# Altium PCB 48V-5V Buck.PcbDoc
Units mm, origin at the board's own origin, x right, y up, seen from the top; angles counter-clockwise.
Board outline 45.52 x 39.22 mm, 4 copper layers (L1-TOP, L2-GND, L3-GND, L4-BOT), stack 1.65 mm thick; 39 components, 14 nets, 99 pads, 43 vias.
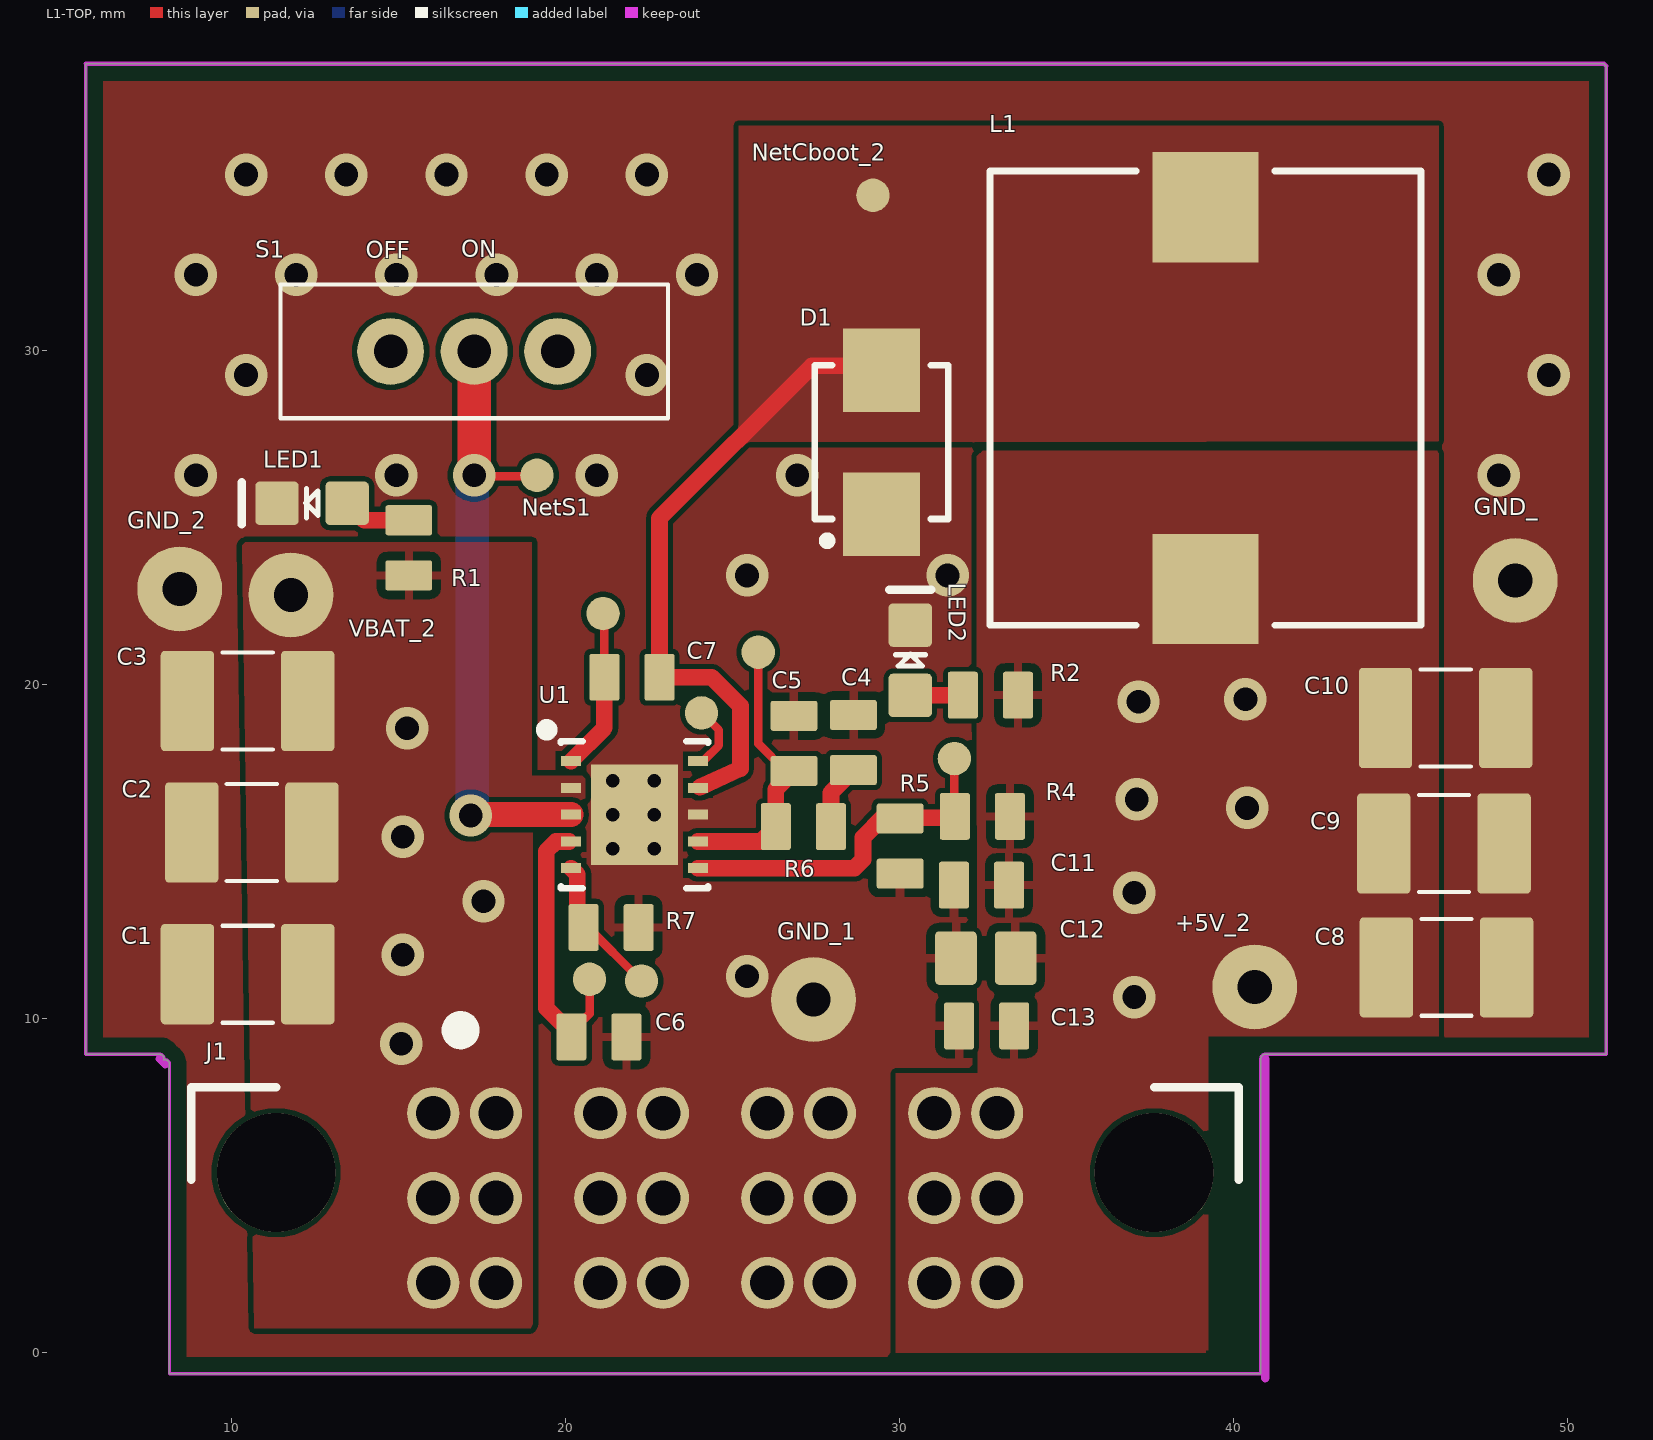
[diagram p0: L1-TOP view]
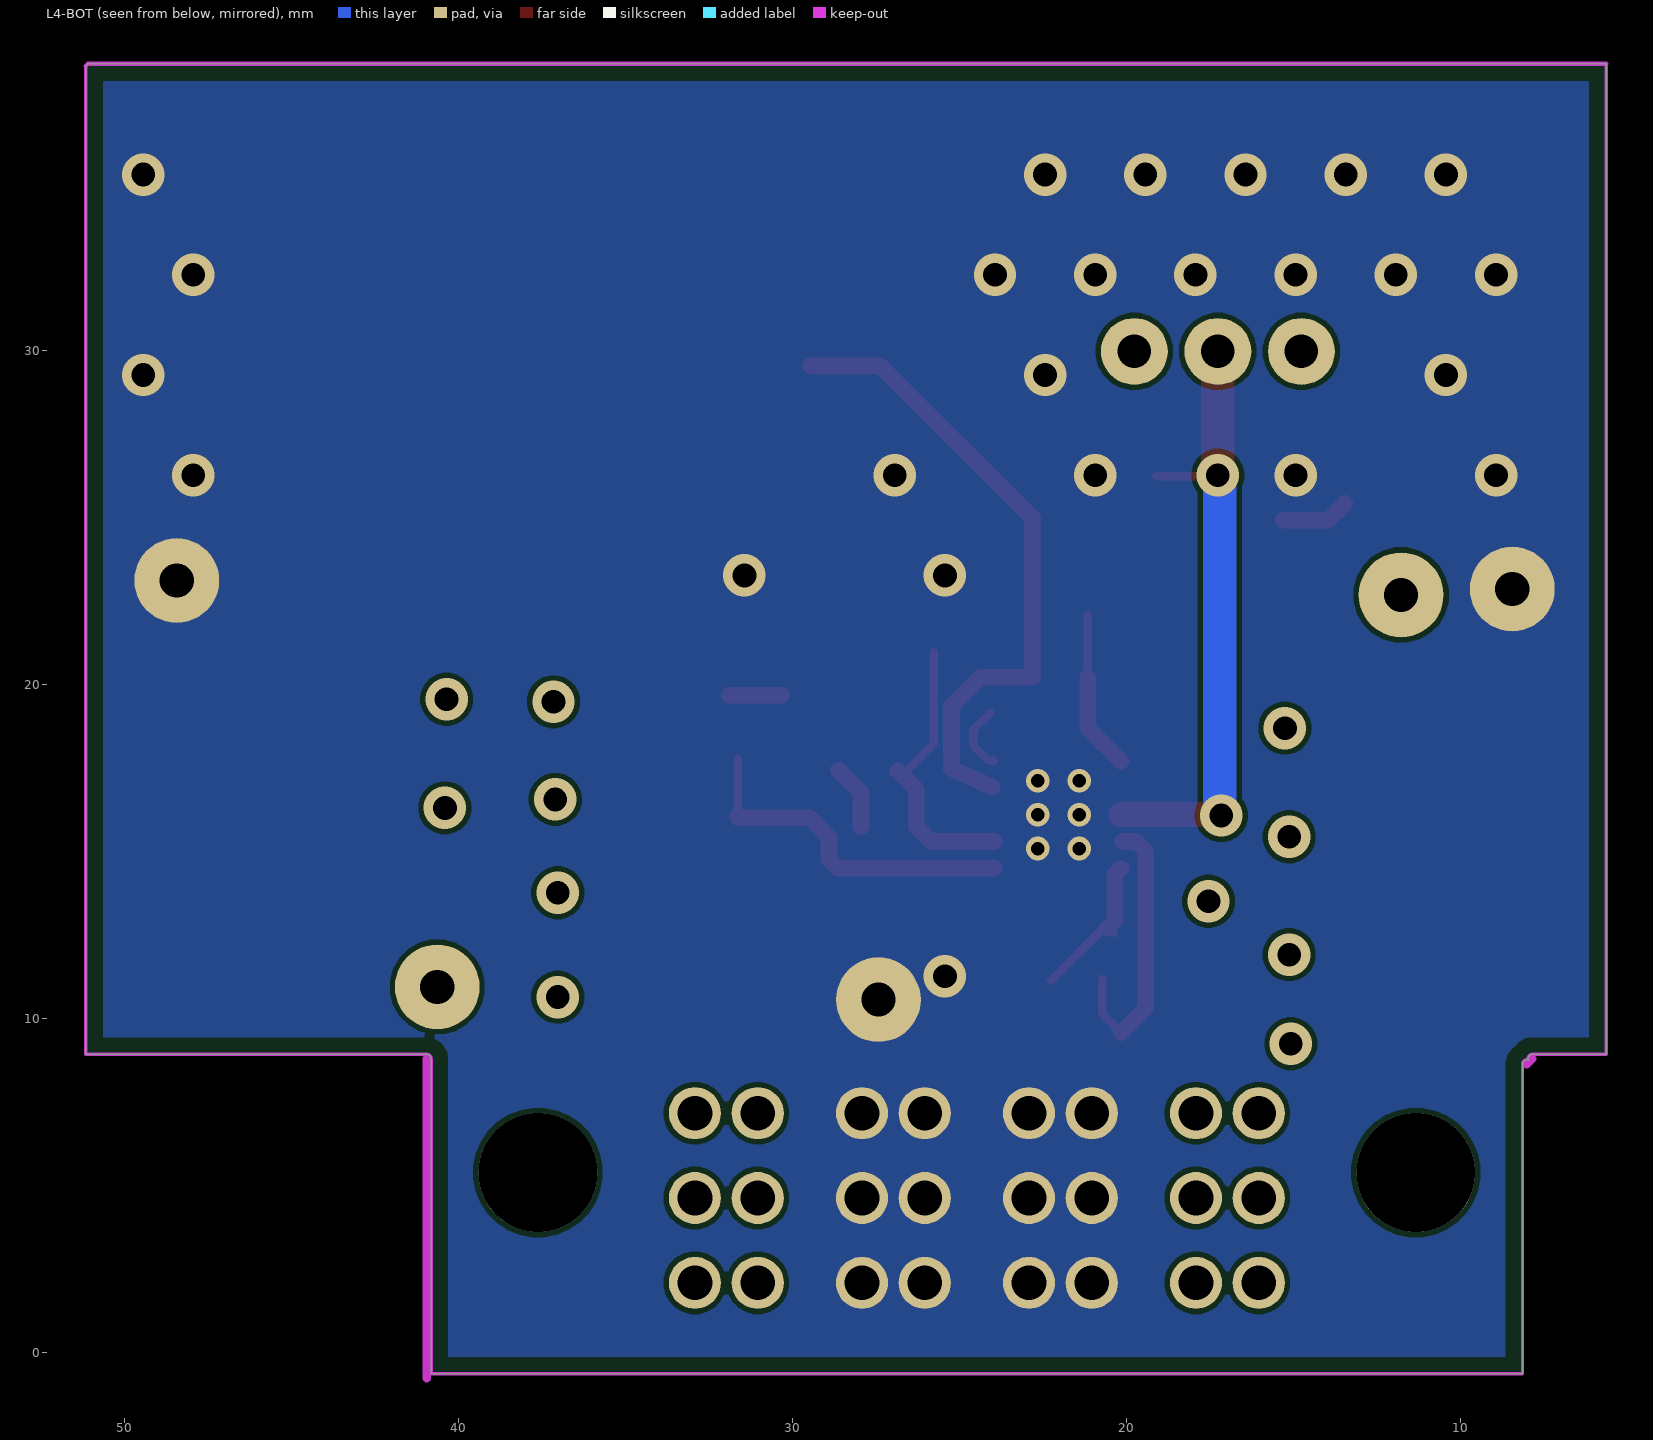
[diagram p1: L4-BOT view, seen from below]
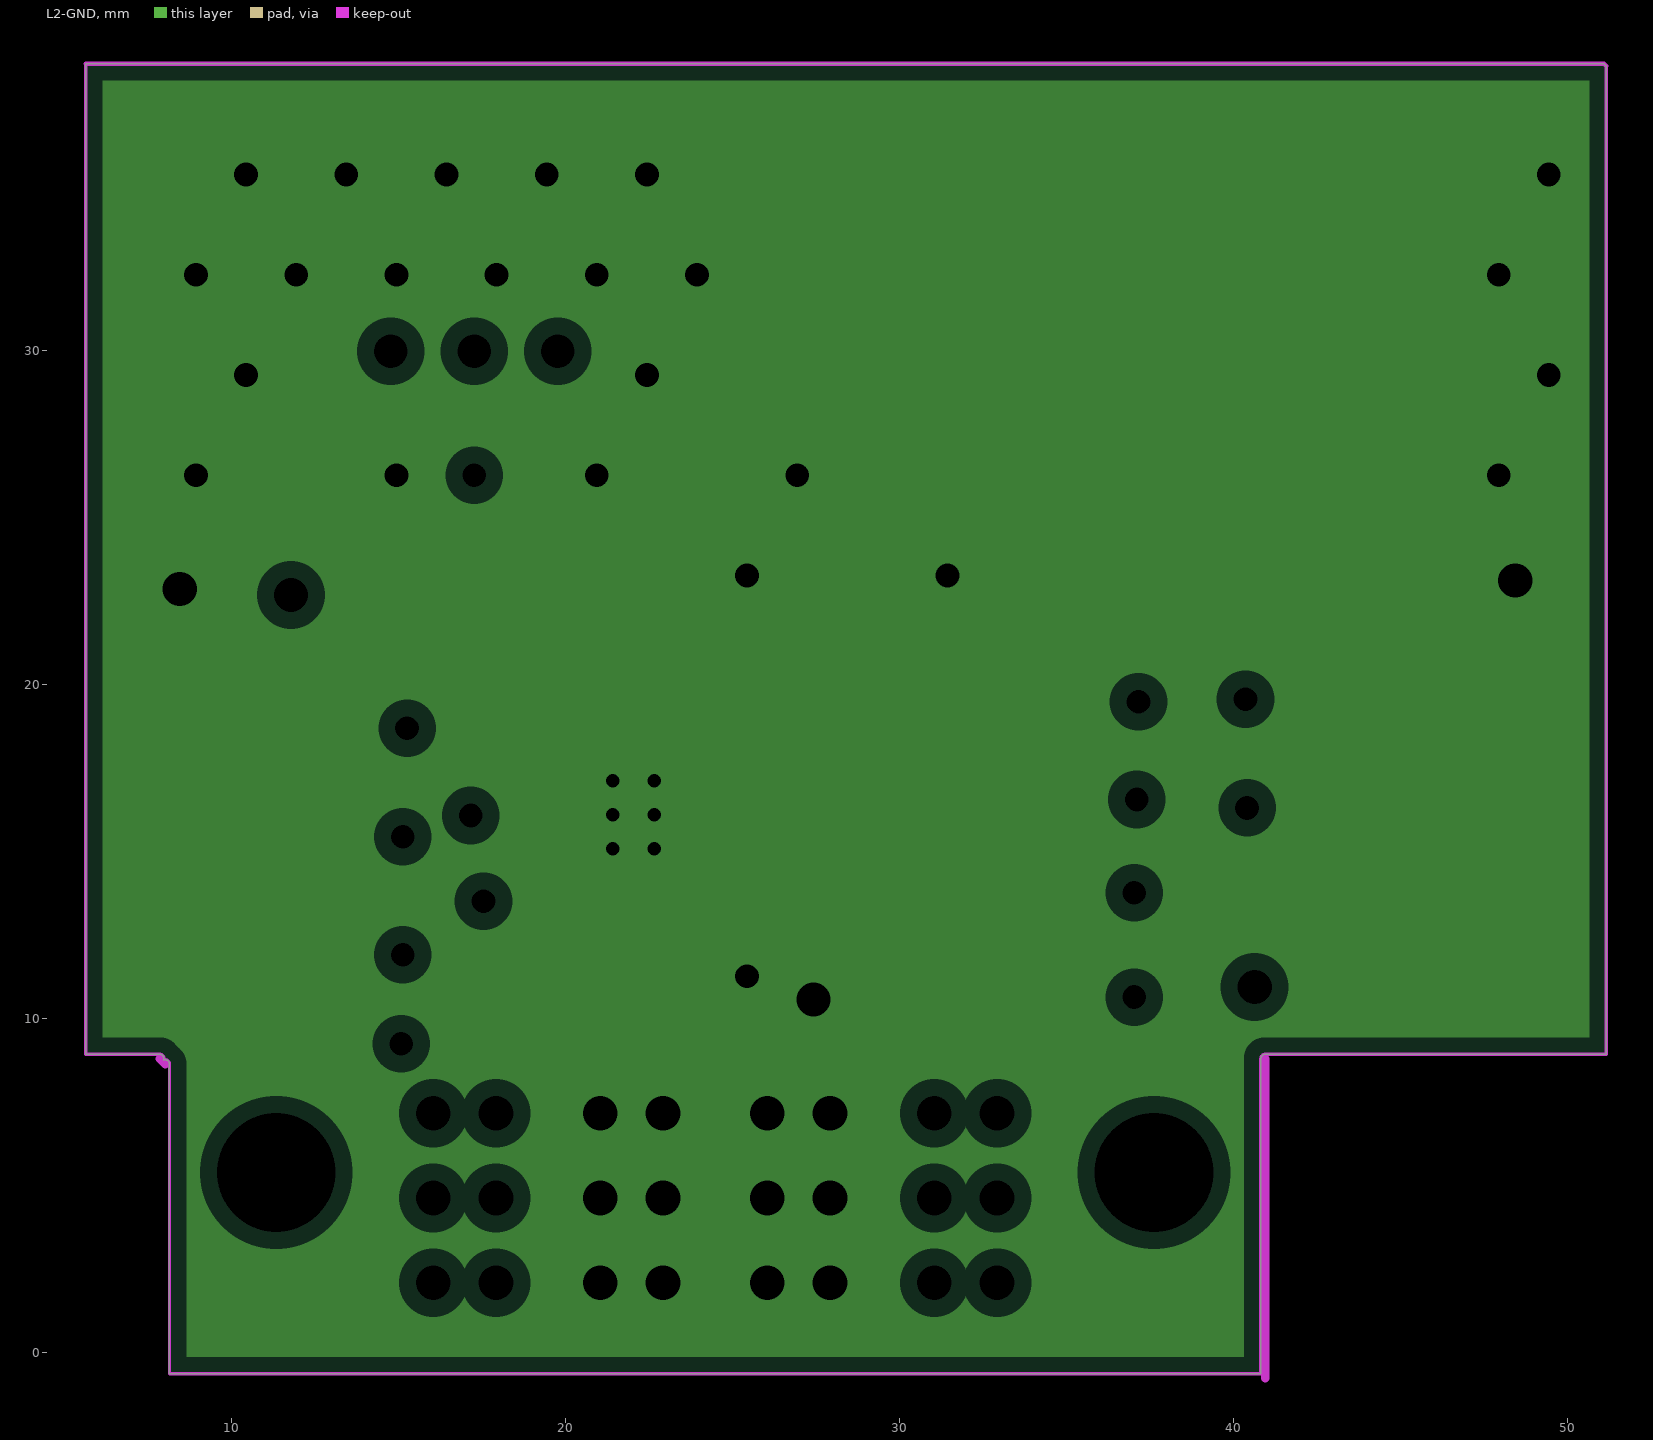
[diagram p2: L2-GND, clearances drawn from the general rule]
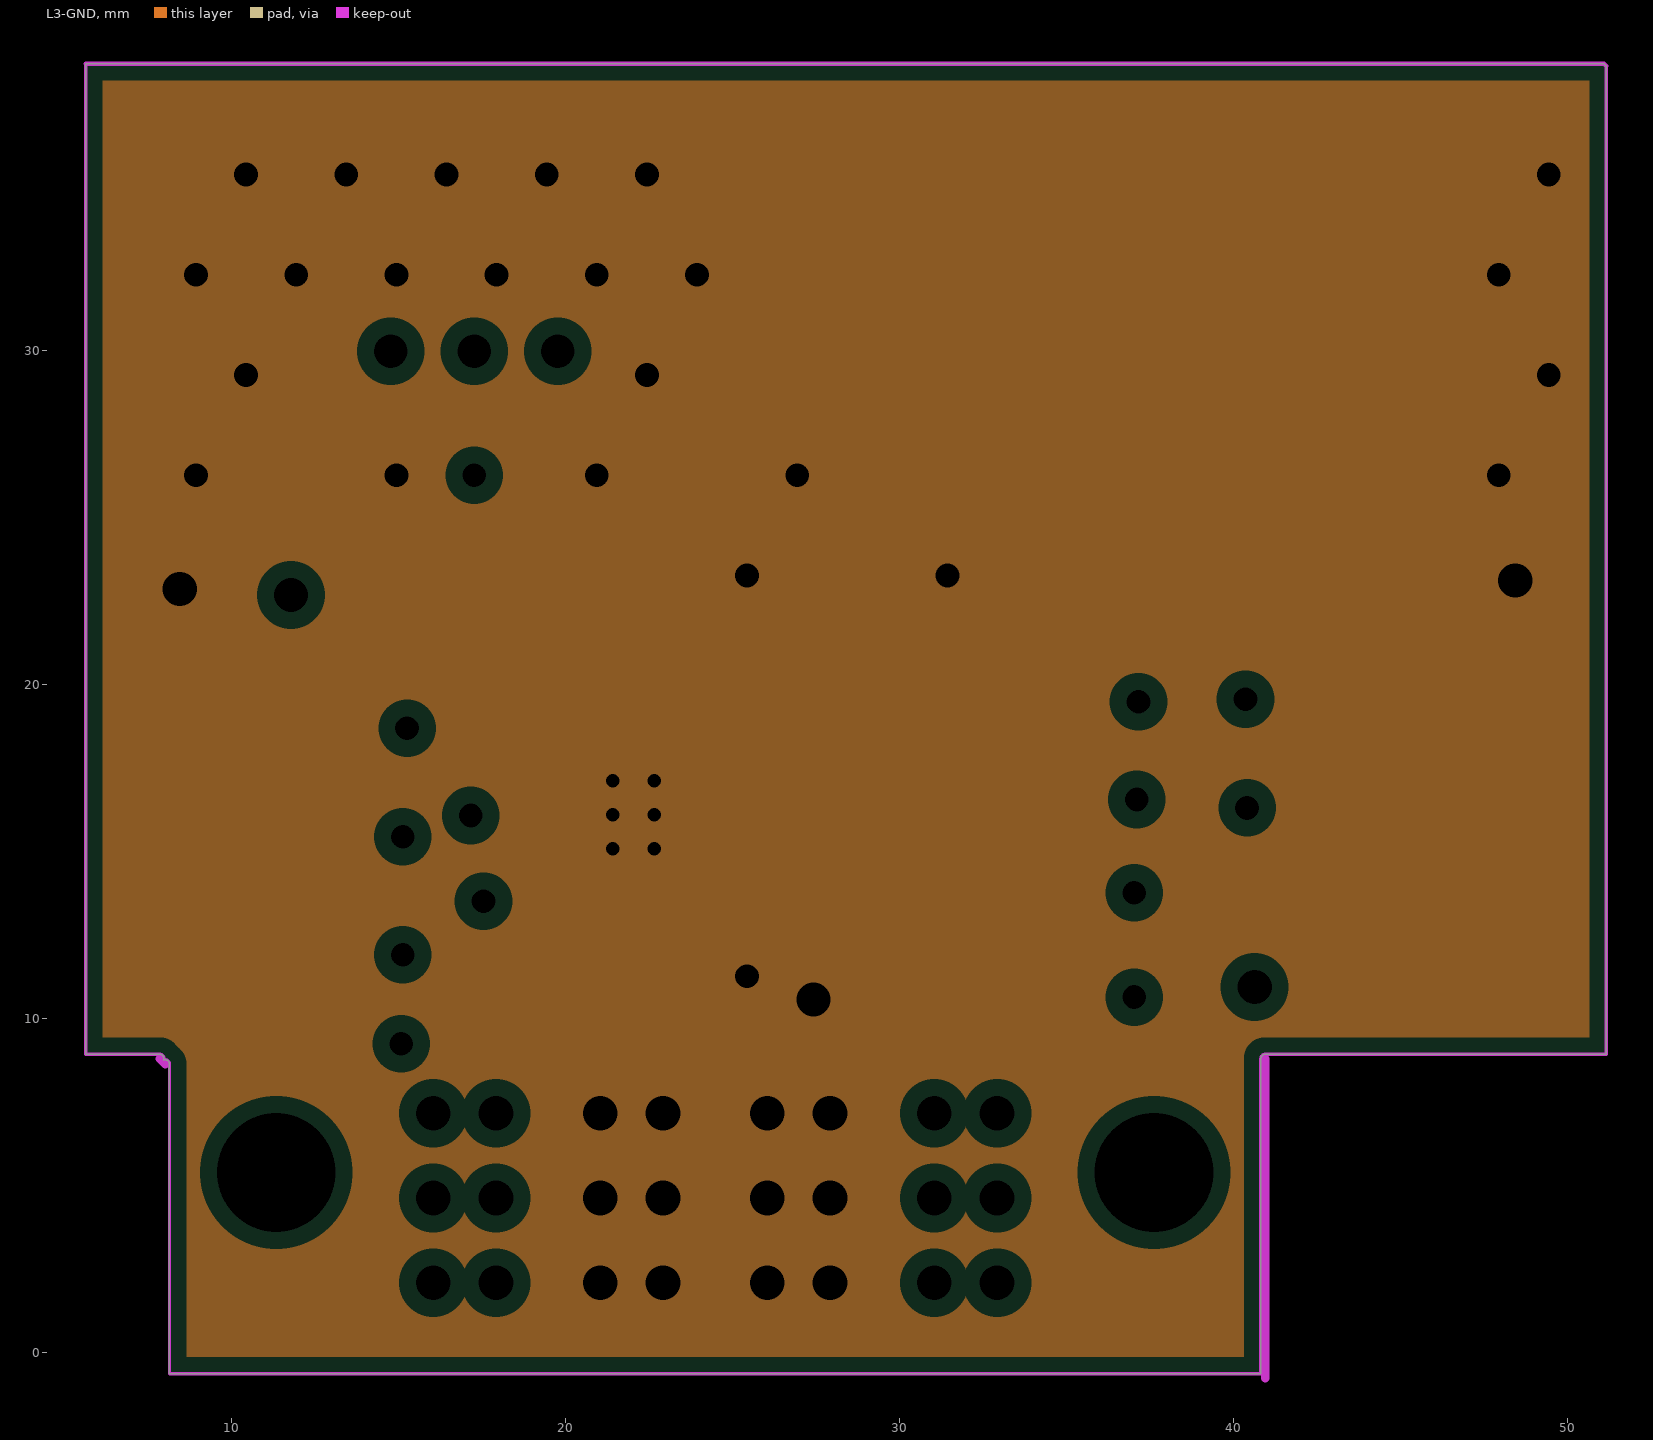
[diagram p3: L3-GND, clearances drawn from the general rule]
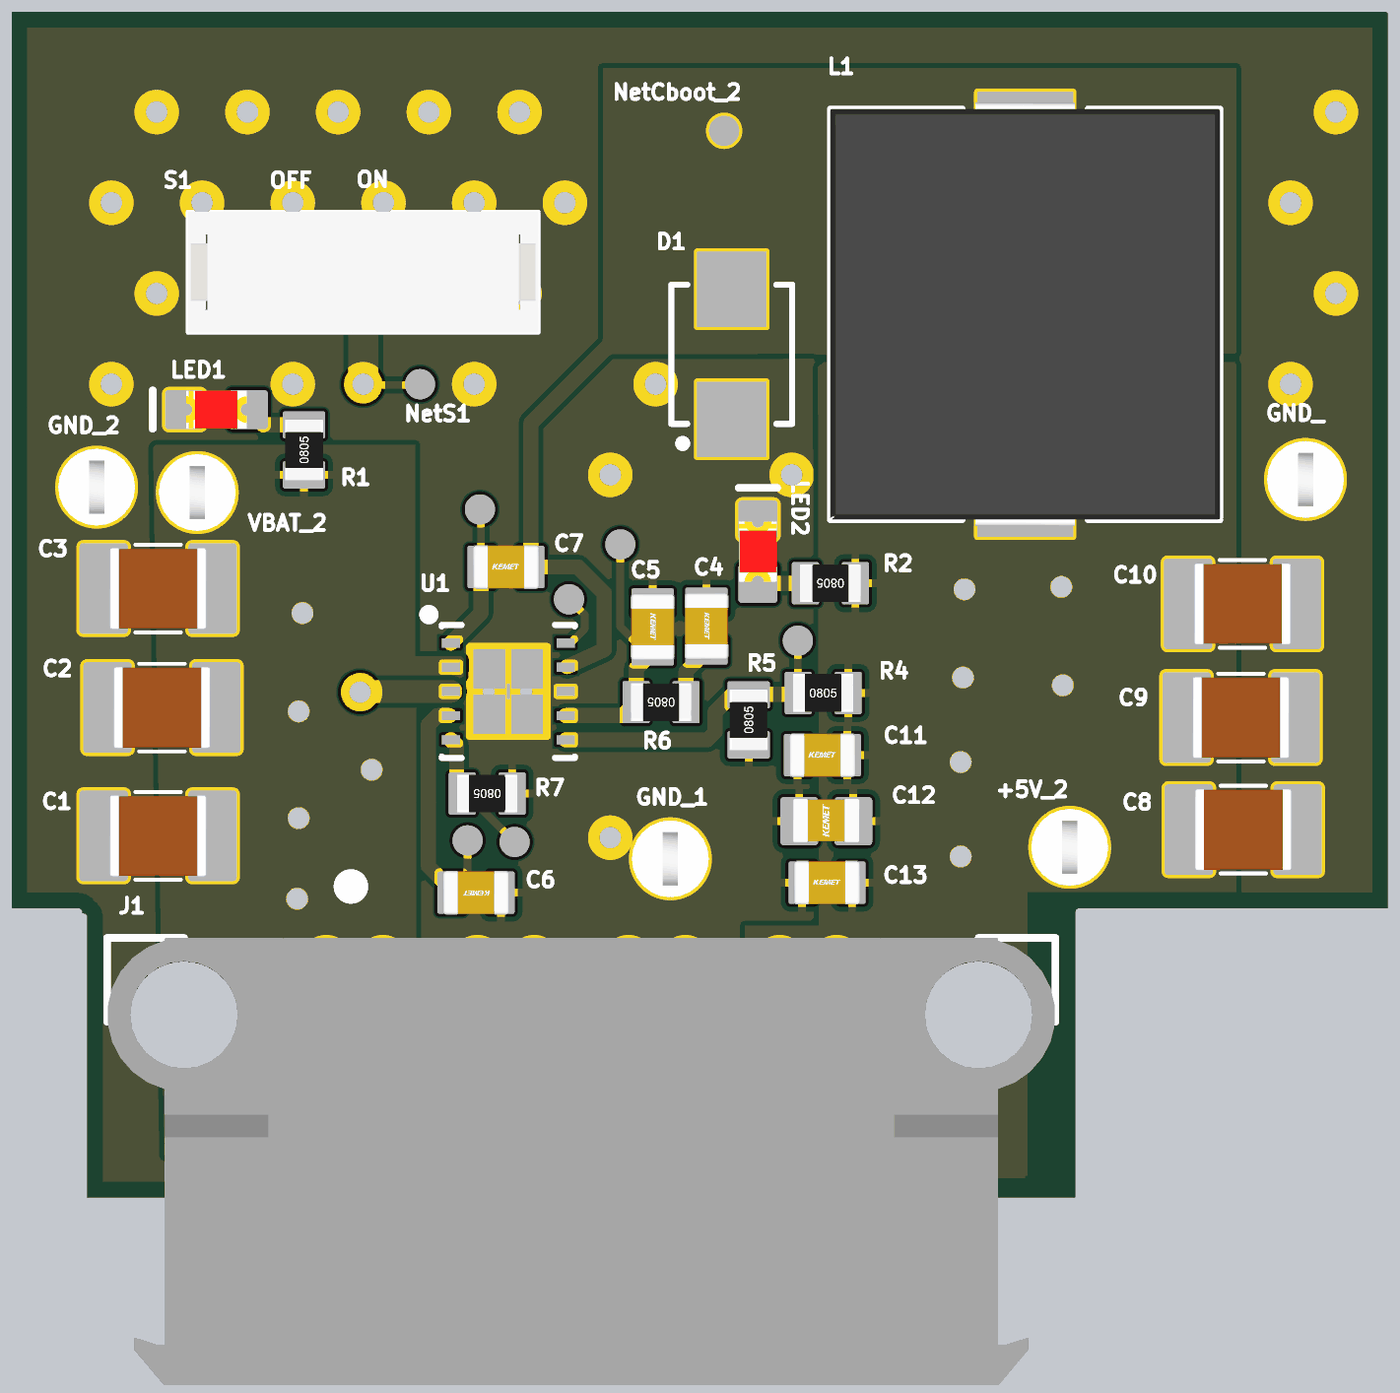
[diagram p4: 3D render of the assembled board from above, using the file's embedded part models]

## Layer stack, top to bottom
Top Solder: solder mask 0.0127, Solder Resist, Dk 3.8
L1-TOP: signal copper 0.075
Dielectric 2: prepreg 0.2, PP-006, Dk 4.6
L2-GND: plane copper 0.0175, net GND
Dielectric 1: core 1.065, FR-4, Dk 4.5
L3-GND: plane copper 0.0175, net GND
Dielectric 3: prepreg 0.2, PP-006, Dk 4.6
L4-BOT: signal copper 0.075
Bottom Solder: solder mask 0.0127, Solder Resist, Dk 3.8

## Board outline
5.646,8.929 7.86,8.929 cw(c7.86,8.801) 7.987,8.801 7.979,8.758 cw(c8.023,8.638) 8.15,8.638 8.15,-0.635 40.824,-0.635 40.824,8.801 cw(c40.952,8.801) 40.952,8.929 51.162,8.929 51.162,38.513 51.092,38.583 5.646,38.583

## Design rules (kind name [scope] priority, off if disabled: settings)
BoardOutlineClearance [All] p1: gap=0.508 ignorepadtopadclearanceinfootprint=FALSE
Clearance [All] p1: gap=0.152 ignorepadtopadclearanceinfootprint=TRUE
HoleSize [All] p1: absolutevalues=TRUE maxlimit=3.048 minlimit=0.025 maxpercent=80.000 minpercent=20.000
MinimumSolderMaskSliver [All] p1: minsoldermaskwidth=0.025
PlaneClearance [All] p1: clearance=0.508
PlaneConnect [All] p1: pad.planeconnectstyle=Relief pad.reliefexpansion=0.508 pad.reliefentries=4 pad.reliefconductorwidth=0.254 pad.reliefairgap=0.254 via.planeconnectstyle=Direct via.reliefexpansion=0.508 via.reliefentries=4 via.reliefconductorwidth=0.254 via.reliefairgap=0.254
PolygonConnect PolygonConnect_SMALL [(HasFootprint('CAP0805') OR HasFootprint('CAP0603') OR HasFootprint('RES0603') OR HasFootprint('RES0805') OR HasFootprint('CAP2012') OR HasFootprint('SOD-923') OR HasFootprint('SOD-128'))] p1: connectstyle=Relief reliefconductorwidth=0.254 reliefentries=4 polygonreliefangle="90 Angle" airgapwidth=0.254
PolygonConnect PolygonConnect_VIA [IsVIA] p2: connectstyle=Direct reliefconductorwidth=0.508 reliefentries=4 polygonreliefangle="90 Angle" airgapwidth=0.254
PolygonConnect [All] p3: connectstyle=Direct reliefconductorwidth=0.254 reliefentries=4 polygonreliefangle="90 Angle" airgapwidth=0.254
RoutingVias [All] p1: holewidth=0.305 width=0.61 viastyle="Through Hole" minholewidth=0.305 minwidth=0.61 maxholewidth=0.711 maxwidth=1.27
SilkToSolderMaskClearance [HasFootprint('LED_0805_RED')] p1: minsilkscreentomaskgap=0.025 clearancetoexposedcopper=TRUE
SolderMaskExpansion [All] p1: expansion=0.102 istentingtop=FALSE
Width [All] p1: maxlimit=1.27 minlimit=0.152 preferedwidth=0.152 minimp=50.000000 maximp=50.000000 favimp=50.000000
25 further rules are at their usual default settings.

## Classes and differential pairs
component class "48V-5V Buck": +5V_2 C1 C2 C3 C4 C5 C7 C8 C9 C10 C11 C12 C13 D1 GND_ GND_1 GND_2 J1 L1 LED1 LED2 NetCboot_2 NetS1 R1 R2 R4 R5 R6 R7 S1 U1 VBAT_2

## Components (designator, comment, footprint, x,y, rotation, side; value= is the part's Value field where it differs from the comment)
+5V_2 "TESTPOINT_LOOP" TESTPOINT_LOOP 40.64,10.947 r90 top
C1 "CAP_2.2uF_100V_1210_1" CAPC3225X270N 10.49,11.328 r0 top value=2.2μF
C2 "CAP_2.2uF_100V_1210_1" CAPC3225X270N 10.617,15.57 r0 top value=2.2μF
C3 "CAP_2.2uF_100V_1210_1" CAPC3225X270N 10.49,19.507 r0 top value=2.2μF
C4 "CAP_6.8nF_100V_0805" CAP0805 28.626,18.263 r270 top value=6.8nF
C5 "CAP_68pF_50V_0805" CAP0805 26.848,18.237 r270 top value=6.8pF
C6 "CAP_2.7nF_50V_0805" CAP0805 21.006,9.449 r180 top value=2.7nF
C7 "CAP_0.1uF_10V_0805" CAP0805 21.996,20.218 r0 top value=0.1uF
C8 "CAP_47uF_16V_1210" CAPC3225X270N 46.38,11.532 r180 top value=47μF
C9 "CAP_47uF_16V_1210" CAPC3225X270N 46.304,15.24 r180 top value=47μF
C10 "CAP_47uF_16V_1210" CAPC3225X270N 46.355,18.999 r180 top value=47μF
C11 "CAP_0.1uF_100V_0805" CAP0805 32.461,13.995 r0 top value=0.1µF
C12 "CAP_1uF_50V_0805" CAP2012 32.588,11.811 r0 top value=1μF
C13 "CAP_4.7uF_50V_0805" CAP0805 32.614,9.779 r0 top value=4.7μF
D1 "DIO_SCHOTTKY_100V_5.5A" DIO_SCHOTTKY_45V_5A_vF480mV 29.464,27.254 r90 top
GND_ "TESTPOINT_LOOP" TESTPOINT_LOOP 48.438,23.114 r90 top
GND_1 "TESTPOINT_LOOP" TESTPOINT_LOOP 27.432,10.566 r90 top
GND_2 "TESTPOINT_LOOP" TESTPOINT_LOOP 8.458,22.86 r90 top
J1 "CON_2POS_SCREW_TERM" MPT-04-01-01-L-RA-SD 24.487,-0.762 r0 top
L1 "IND_8.2uH_8.5A" IND_8.2uH_8.5A 39.167,28.575 r270 top value=8.2μH
LED1 "LED_RED" LED_0805_RED 12.421,25.425 r180 top
LED2 "LED_RED" LED_0805_RED 30.328,20.726 r90 top
NetCboot_1 "TESTPOINT_1MM_CIRCLE" TESTPOINT_CIRCLE_1MM 21.133,22.123 r90 top
NetCboot_2 "TESTPOINT_1MM_CIRCLE" TESTPOINT_CIRCLE_1MM 29.21,34.646 r90 top
NetCcomp2_2 "TESTPOINT_1MM_CIRCLE" TESTPOINT_CIRCLE_1MM 25.777,20.967 r90 top
NetCss "TESTPOINT_1MM_CIRCLE" TESTPOINT_CIRCLE_1MM 20.726,11.176 r90 top
NetRfbb "TESTPOINT_1MM_CIRCLE" TESTPOINT_CIRCLE_1MM 31.648,17.78 r90 top
NetRpg_1 "TESTPOINT_1MM_CIRCLE" TESTPOINT_CIRCLE_1MM 24.079,19.152 r90 top
NetRT "TESTPOINT_1MM_CIRCLE" TESTPOINT_CIRCLE_1MM 22.282,11.125 r90 top
NetS1 "TESTPOINT_1MM_CIRCLE" TESTPOINT_CIRCLE_1MM 19.152,26.264 r90 top
R1 "RES_4.7kΩ_0805_5%" RES0805 15.316,24.092 r90 top value=4.7kΩ
R2 "RES_150Ω_0805_5%" RES0805 32.726,19.682 r180 top value=150Ω
R4 "RES_60.4kΩ_0805_1%" RES0805 32.487,16.053 r0 top value="60.5 kΩ"
R5 "RES_11.5kΩ_0805_0.1%" RES0805 30.023,15.164 r90 top value=11.5kΩ
R6 "RES_10kΩ_0805_5%" RES0805 27.127,15.748 r180 top value=10kΩ
R7 "RES_232kΩ_0805_1%" RES0805 21.374,12.725 r180 top value=232kΩ
S1 "SW_SLIDE_TOGGLE" SW_SLIDE_TOGGLE 17.272,29.972 r180 top
U1 "TPS54561" BUCK_TPS54561DPRR 22.073,16.104 r0 top
VBAT_2 "TESTPOINT_LOOP" TESTPOINT_LOOP 11.786,22.682 r90 top

## Footprints (in the part's own frame and the unit in brackets; to place one, negate y for a bottom-side part, rotate by r counter-clockwise, add the part's x,y. Pads: shape width x height; smd on the part's side, far side on the other; paste and mask are expansions set on the pad)
BUCK_TPS54561DPRR [mm] "Buck Switching Regulator IC Positive Adjustable 0.8V 1 Output 5A 10-WDFN Exposed Pad"
  rect 0.6x0.3 smd: 1(-1.9,1.6) 2(-1.9,0.8) 3(-1.9,0) 4(-1.9,-0.8) 5(-1.9,-1.6) 6(1.9,-1.6) 7(1.9,-0.8) 8(1.9,0) 9(1.9,0.8) 10(1.9,1.6)
  rect 2.6x3 smd paste-1.245: 11(0,0)
  silkscreen extent -2.7,-2.2 2.2,2.61, body extent -2.05,-2.05 2.05,2.05, height 0.8
CAP0805 [mm] "Chip Capacitor, Body 2.0x1.2mm, Height 0.45mm, IPC Medium Density"
  rrect15% 0.9x1.4 smd: 1(-0.825,0) 2(0.825,0)
  body extent -1.1,-0.73 1.1,0.73, height 1.39
CAP2012 [mm]
  rrect20% 1.25x1.6 smd: 1(-0.895,0) 2(0.895,0)
  body extent -1.1,-0.7 1.1,0.75, height 1.41
CAPC3225X270N [mm]
  rrect15% 1.6x3 smd: 1(-1.8,0) 2(1.8,0)
  silkscreen extent -0.75,-1.45 0.75,1.45, body extent -1.6,-1.35 1.6,1.35, height 2.55
DIO_SCHOTTKY_45V_5A_vF480mV [mm] "Molded Diode, 2-Leads, Body 4.31x3.62mm, IPC Medium Density"
  rect 2.5x2.3 smd: 1(-2.15,0) 2(2.15,0)
  silkscreen extent -3.07,-2 2.3,2, body extent -2.28,-1.97 2.28,1.97, height 2.44
IND_8.2uH_8.5A [mm]
  rect 3.3x3.175 smd: 1(-5.715,0) 2(5.715,0)
  silkscreen extent -6.8,-6.45 6.8,6.45, body extent -7.01,-6.45 7.01,6.45, height 3.5
LED_0805_RED [mm] "SMD, 2-Leads, Body 2x1.25mm"
  rrect20% 1.3x1.3 smd: 1(-1.05,0) 2(1.05,0)
  silkscreen extent -0.18,-0.63 2.11,0.64, body extent -1,-0.62 1,0.63, height 1.12
MPT-04-01-01-L-RA-SD [mm]
  round 1.56 hole 1.04 paste+0: 1(-8.44,2.85) 1(-6.56,2.85) 2(-3.44,2.85) 2(-1.56,2.85) 3(1.56,2.85) 3(3.44,2.85) 4(6.56,2.85) 4(8.44,2.85)
  round 1.56 hole 1.04: 1(-8.44,5.39) 1(-8.44,7.93) 1(-6.56,5.39) 1(-6.56,7.93) 2(-3.44,5.39) 2(-3.44,7.93) 2(-1.56,5.39) 2(-1.56,7.93) 3(1.56,5.39) 3(1.56,7.93) 3(3.44,5.39) 3(3.44,7.93) 4(6.56,5.39) 4(6.56,7.93) 4(8.44,5.39) 4(8.44,7.93)
  round 3.56 hole 3.56 unplated: ""(-13.14,6.15) ""(13.14,6.15)
  silkscreen extent -15.68,5.94 15.68,10.67, body extent -15.68,-6.1 15.68,8.71, height 10.89
RES0805 [mm] "Chip Resistor, 2-Leads, Body 2.00x1.25mm, IPC High Density"
  rrect15% 0.9x1.4 smd: 1(-0.825,0) 2(0.825,0)
  body extent -1,-0.62 1,0.63, height 0.61
SW_SLIDE_TOGGLE [mm]
  round 2 hole 1: 2(0,0) 3(2.5,0) GND(-2.5,0)
  silkscreen extent -5.8,-2 5.8,2, body extent -5.8,-2 5.8,2, height 7
TESTPOINT_CIRCLE_1MM [mm]
  round 1 smd: 1(0,0)
TESTPOINT_LOOP [mm]
  round 2.54 hole 1.02: 1(0,0)
  body extent -1.27,-1.27 1.27,1.27, height 4.57

## Part data
+5V_2 GND_ GND_1 GND_2 VBAT_2: "TESTPOINT THRUHOLE", Manufacturer 1="Keystone Electronics", Manufacturer Part Number 1=5002, Package/Footprint=TH, Supplier Part Number 1=36-5002-ND, Mounting Type=TH, Supplier 1=Digi-Key
C1 C2 C3: "CAP CER 2.2UF 100V X7R 1210", Manufacturer 1="TDK Corporation", Manufacturer Part Number 1=C3225X7R2A225K230AB, Package/Footprint=1210, Supplier Part Number 1=445-4497-1-ND, Voltage Rating=100V, Mounting Type=SMD, Supplier 1=Digi-Key
C4: "CAP CER 6800PF 50V C0G/NP0 0805", Manufacturer 1="Murata Electronics", Manufacturer Part Number 1=GRM2195C1H682JA01D, Package/Footprint=0805, Supplier Part Number 1=490-1638-6-ND, Voltage Rating=50V, Supplier 1=Digi-Key
C5: "CAP CER 68PF 50V C0G/NP0 0805", Manufacturer 1="Kyocera AVX", Manufacturer Part Number 1=KGM21BCG1H680JT, Package/Footprint=0805, Supplier Part Number 1=478-KGM21BCG1H680JTDKR-ND, Voltage Rating=50V, Supplier 1=Digi-Key
C6: "CAP CER 2700PF 50V C0G 0805", Manufacturer 1="TDK Corporation", Manufacturer Part Number 1=C2012C0G1H272J060AA, Package/Footprint=0805, Supplier Part Number 1=445-7508-1-ND, Voltage Rating=50V, Supplier 1=Digi-Key
C7: "CAP CER 0.1uF 10V 0805", Manufacturer 1=KEMET, Manufacturer Part Number 1=C0805C104K8RAC7800, Package/Footprint=0805, Supplier Part Number 1=399-C0805C104K8RAC7800DKR-ND, Voltage Rating=10V, Supplier 1=Digi-Key
C8 C9 C10: "CAP CER 47uF 16V X5R 1210", Manufacturer 1="Murata Electronics", Manufacturer Part Number 1=GRM32ER61C476KE15L, Package/Footprint=1210, Supplier Part Number 1=490-6539-6-ND, Voltage Rating=16V, Mounting Type=SMD, Supplier 1=Digi-Key
C11: "CAP CER 0.1UF 100V X7R 0805", Manufacturer 1="TDK Corporation", Manufacturer Part Number 1=C2012X7R2A104K125AA, Package=0805, Supplier Part Number 1=445-1418-1-ND, Voltage Rating=100V, Supplier 1=Digi-Key
C12: "CAP CER 1UF 50V X7R 0805", LCSC Part #=C28323, Manufacturer 1="Samsung Electro-Mechanics", Manufacturer Part Number 1=CL21B105KBFNNNG, Package=0805, Supplier Part Number 1=1276-6470-1-ND, Voltage Rating=50V, Mounting Type=SMD, Supplier 1=Digi-Key
C13: "CAP CER 4.7UF 50V X5R 0805", Dielectric=X5R, LCSC Part #=C1779, Manufacturer 1="TDK Corporation", Manufacturer Part Number 1=CGA4J3X5R1H475K125AB, Package=0805, Supplier Part Number 1=445-7882-1-ND, Voltage Rating=50V, Mounting Type=SMD, Supplier 1=Digi-Key
D1: library part DIO_SCHOTTKY_45V_5A, "DIODE SCHOTTKY 45V 5A DO214AA", Average Rectified Current=5A, Manufacturer 1="Comchip Technology", Manufacturer Part Number 1=CDBB545LR-HF, Package/Footprint=SOD-123, Supplier Part Number 1=641-CDBB545LR-HFTR-ND, Mounting Type=SMD, Supplier 1=Digi-Key, vf(Max)=480mV, Vr (Max)=45V
J1: library part CON_4POS_POWERBLADE_MALE, "CONN HDR 4POS 5MM R/A SLDR", Manufacturer 1="Samtec Inc.", Manufacturer Part Number 1=MPT-04-01-01-L-RA-SD, Package/Footprint="PowerStrip™ 30 MTS", Supplier Part Number 1=SAM9727-ND, Mounting Type=TH, Supplier 1=Digi-Key
L1: "FIXED IND 8.2UH 8.5A 28 MOHM SMD", Current Rating=8.5A, Manufacturer 1="Vishay Dale", Manufacturer Part Number 1=IHLP5050CEER8R2M01, Package/Footprint=SMD, Supplier Part Number 1=541-2596-6-ND, Mounting Type=SMD, Supplier 1=Digi-Key
LED1 LED2: "LED RED DIFFUSED 0805 SMD", Forward Voltage Drop=2V, Manufacturer 1=OSRAM, Manufacturer Part Number 1="LS R976-NR-1", Package/Footprint=0805, Supplier Part Number 1=475-1278-1-ND, Mounting Type=SMD, Supplier 1=Digi-Key
NetCboot_1 NetCboot_2 NetCcomp2_2 NetCss NetRfbb NetRpg_1 NetRT NetS1: "TESTPOINT 1MM CIRCLE"
R1: "RES 4.7K OHM 5% 1/8W 0805", LCSC Part #=C17673, Manufacturer 1=Yageo, Manufacturer Part Number 1=RC0805JR-074K7L, Package=0805, Supplier Part Number 1=311-4.7KARCT-ND, Mounting Type=SMD, Supplier 1=Digi-Key
R2: "RES 150 OHM 5% 1/8W 0805", Manufacturer 1=YAGEO, Manufacturer Part Number 1=RC0805JR-07150RL, Supplier Part Number 1=311-150ARDKR-ND, Tolerance=5%, Mounting Type=SMD, Supplier 1=Digi-Key
R4: "RES 60.5 kOHM 63 mW 0805", Manufacturer 1="Vishay Dale", Manufacturer Part Number 1=RCS080560K4FKEA, Package/Footprint=0805, Supplier Part Number 1=541-RCS080560K4FKEADKR-ND, Mounting Type=SMD, Supplier 1=Digi-Key
R5: "RES 11.5K OHM 0.1% 1/10W 0805", Manufacturer 1="TE Connectivity Passive Product", Manufacturer Part Number 1=RN73C2A11K5BTDF, Package/Footprint=0805, Supplier Part Number 1=A103292DKR-ND, Mounting Type=SMD, Supplier 1=Digi-Key
R6: "RES 10K OHM 5% 1/8W 0805", LCSC Part #=C17414, Manufacturer 1="Panasonic Electronic Components", Manufacturer Part Number 1=ERJ-6GEYJ103V, Package/Footprint=0805, Supplier Part Number 1=P10KACT-ND, Mounting Type=SMD, Supplier 1=Digi-Key
R7: "RES 232K OHM 1% 1/8W 0805", LCSC Part #=0, Manufacturer 1=Yageo, Manufacturer Part Number 1=RC0805FR-07232KL, Package=0805, Supplier Part Number 1=311-232KCRDKR-ND, Mounting Type=SMD, Supplier 1=Digi-Key
S1: "SWITCH SLIDE SPDT 200MA 30V", Manufacturer 1=E-Switch, Manufacturer Part Number 1=100SP1T1B4M2QE, Package/Footprint=TH, Supplier Part Number 1=EG1903-ND, Voltage Rating (DC)=30V, Mounting Type=TH, Supplier 1=Digi-Key, Throw Configuration=SPDT
U1: "Buck Switching Regulator IC Positive Adjustable 0.8V 1 Output 5A 10-WDFN Exposed Pad", Manufacturer 1="Texas Instruments", Manufacturer Part Number 1=TPS54561DPRR, Package/Footprint="10-WDFN Exposed Pad", Supplier Part Number 1=296-40803-1-ND, Mounting Type=SMD, Supplier 1=Digi-Key

## Via types
v1: diameter 1.27, hole 0.711, L1-TOP to L4-BOT, 26 vias
v2: diameter 1.27, hole 0.711, L1-TOP to L4-BOT, tented both sides, 11 vias
v3: diameter 0.711, hole 0.406, L1-TOP to L4-BOT, 6 vias

## Nets (pads, with @x,y where several pads share a name; then routed paths per layer and width w, separated by ;. In a path a pad name is that pad's centre, name@x,y a point inside that pad or via, vN(x,y) a via of type N, cw(c..) or ccw(c..) an arc to the next point about the centre after c; other vN are vias at no path point)
+5V: +5V_2.1 C8.2 C9.2 C10.2 C11.2 C12.2 C13.2 J1.4 L1.2 R2.1 R4.2
  other v2: 37.033,10.643 37.033,13.767 40.411,16.307 37.109,16.561 37.16,19.482 40.361,19.558
GND: C1.1 C2.1 C3.1 C4.1 C5.1 C6.1 C8.1 C9.1 C10.1 C11.1 C12.1 C13.1 D1.1 GND_1.1 GND_2.1 GND_.1 J1.2 J1.3 LED1.2 LED2.2 R5.1 R7.1 U1.8 U1.11
  other v1: 25.444,11.266 25.444,23.266 31.444,23.266 8.944,26.266 14.944,26.266 20.944,26.266 26.944,26.266 47.944,26.266 10.444,29.266 22.444,29.266 49.444,29.266 8.944,32.266 11.944,32.266 14.944,32.266 17.944,32.266 20.944,32.266 23.944,32.266 47.944,32.266 10.444,35.266 13.444,35.266 16.444,35.266 19.444,35.266 22.444,35.266 49.444,35.266
  other v3: 21.423,15.088 22.665,15.088 21.423,16.104 22.665,16.104 21.423,17.12 22.665,17.12
NetC4_2: C4.2 R6.1 | length 2
  L1-TOP w0.5: R6.1 27.952,16.764 C4.2
NetC5_2: C5.2 NetCcomp2_2.1 R6.2 U1.7 | length 8.5
  L1-TOP w0.254: NetCcomp2_2.1 25.777,18.233 26.598,17.412 C5.2
  L1-TOP w0.5: U1.7 25.858,15.304 R6.2 26.302,16.867 C5.2
NetC6_2: C6.2 NetCss.1 U1.4 | length 8.4
  L1-TOP w0.254: C6.2@20.164,9.583 20.726,10.145 NetCss.1
  L1-TOP w0.5: U1.4@20.123,15.303 19.724,15.303 19.431,15.011 19.431,10.316 C6.2@20.164,9.583
NetC7_1: C7.1 NetCboot_1.1 U1.1 | length 4.8
  L1-TOP w0.254: C7.1 NetCboot_1.1@21.171,22.085
  L1-TOP w0.5: U1.1 21.171,18.702 C7.1
NetC7_2: C7.2 D1.2 L1.1 NetCboot_2.1 U1.9 | length 19.3
  L1-TOP w0.254: U1.9 U1.9@24.023,16.927
  L1-TOP w0.5: U1.9@24.023,16.927 25.248,17.483 25.248,19.355 24.384,20.218 C7.2 22.821,24.98 27.38,29.539 D1.2@29.464,29.539
NetLED1_1: LED1.1 R1.2 | length 2.1
  L1-TOP w0.5: LED1.1 13.979,24.917 R1.2
NetLED2_1: LED2.1 R2.2 | length 1.6
  L1-TOP w0.5: LED2.1@30.334,19.682 30.337,19.679 31.897,19.679 R2.2
NetNetRfbb_1: NetRfbb.1 R4.1 R5.2 U1.6 | length 10.4
  L1-TOP w0.254: R4.1@31.648,16.066 NetRfbb.1
  L1-TOP w0.5: U1.6 28.658,14.504 28.911,14.757 28.911,15.424 29.501,16.014 31.623,16.014 R4.1
NetNetRpg_1_1: NetRpg_1.1 U1.10 | length 2
  L1-TOP w0.254: U1.10 23.996,17.727 24.146,17.727 24.597,18.178 24.597,18.633 NetRpg_1.1
NetNetRT_1: NetRT.1 R7.2 U1.5 | length 5.3
  L1-TOP w0.254: R7.2 20.389,12.565 20.389,12.885 20.389,13.019 20.455,12.952 20.615,12.792 NetRT.1
  L1-TOP w0.5: U1.5 20.362,14.314 20.362,12.912 20.389,12.885 R7.2
NetNetS1_1: NetS1.1 S1.2 U1.3 | length 18.8
  L1-TOP w0.254: v1@17.247,26.238 NetS1.1@19.126,26.238
  L1-TOP w0.75: v1@17.17,16.104 U1.3
  L1-TOP w1: S1.2@17.221,29.921 17.272,29.87 v1(17.272,26.264)
  L4-BOT w1: v1(17.17,16.078) 17.221,16.129 17.221,26.213 v1(17.272,26.264)
VBAT: C1.2 C2.2 C3.2 J1.1 R1.1 U1.2 VBAT_2.1
  other v2: 15.088,9.246 15.138,11.913 17.551,13.513 15.138,15.443 15.265,18.694
pads on no net: J1. S1.3 S1.GND

## Polygon pours and split planes (outlines as drawn)
GND on L1-TOP "GND_L01_P009" (solid, remove dead copper, pour order 9): 5.467,38.666 50.913,38.666 50.913,9.082 50.983,9.012 50.855,8.885 40.645,8.885 40.645,-0.442 40.427,-0.66 7.925,-0.66 7.925,8.641 7.843,8.722 5.757,8.722 5.467,9.012
GND on L1-TOP "GND_L01_P008" (solid, remove dead copper, pour order 8): 5.644,38.565 51.091,38.565 51.091,8.981 51.161,8.911 51.033,8.783 40.823,8.783 40.823,-0.544 40.605,-0.762 8.103,-0.762 8.103,8.539 8.021,8.62 5.935,8.62 5.644,8.911
GND on L1-TOP "GND_L01_P007" (solid, remove dead copper, pour order 7): 5.644,38.616 51.091,38.616 51.091,9.031 51.161,8.962 51.033,8.834 40.823,8.834 40.823,-0.493 40.605,-0.711 8.103,-0.711 8.103,8.59 8.021,8.671 5.935,8.671 5.644,8.962
+5V on L1-TOP "+5V_L01_P013" (solid, remove dead copper, pour order 13): 32.411,0 29.947,0 29.947,8.255 29.947,8.357 32.411,8.357
+5V on L1-TOP "+5V_L01_P012" (solid, remove dead copper, pour order 12): 32.387,27 46.228,27 46.228,9.55 43.739,9.55 39.243,9.55 39.243,0.076 32.435,0.076
NetC7_2 on L1-TOP "NETC7_2_L01_P011" (solid, remove dead copper, pour order 11): 46.137,27.279 46.137,36.677 46.162,36.703 25.283,36.703 25.182,36.703 25.182,27.254 25.156,27.228
VBAT on L1-TOP "VBAT_L01_P010" (solid, remove dead copper, pour order 10): 10.246,24.206 18.923,24.206 18.923,17.221 20.527,17.221 20.519,16.459 18.948,16.459 18.948,0.686 18.923,0.66 18.898,0.686 10.617,0.686
VBAT on L1-TOP "VBAT_L01_P004" (solid, remove dead copper, pour order 4): 10.323,24.257 18.999,24.257 18.999,17.272 20.603,17.272 20.596,16.51 19.025,16.51 19.025,0.737 18.999,0.711 18.974,0.737 10.693,0.737
NetC7_2 on L1-TOP "NETC7_2_L01_P005" (solid, remove dead copper, pour order 5): 46.152,27.305 46.152,36.703 46.177,36.728 25.298,36.728 25.197,36.728 25.197,27.28 25.171,27.254
+5V on L1-TOP "+5V_L01_P003" (solid, remove dead copper, pour order 3): 32.36,0 29.896,0 29.896,8.255 29.896,8.357 32.36,8.357
+5V on L1-TOP "+5V_L01_P002" (solid, remove dead copper, pour order 2): 32.311,26.924 46.152,26.924 46.152,9.474 43.663,9.474 39.167,9.474 39.167,0 32.359,0
GND on L4-BOT "GND_L04_P006" (solid, remove dead copper, pour order 6): 5.646,38.583 51.092,38.583 51.092,8.998 51.162,8.929 51.035,8.801 40.824,8.801 40.824,-0.526 40.606,-0.744 8.104,-0.744 8.104,8.557 8.023,8.638 5.936,8.638 5.646,8.929
GND on L3-GND (split plane): 50.652,9.439 40.952,9.439 40.927,9.437 40.852,9.431 40.755,9.407 40.662,9.369 40.577,9.317 40.501,9.252 40.436,9.176 40.384,9.091 40.345,8.998 40.322,8.901 40.316,8.826 40.314,8.801 40.314,-0.124 8.66,-0.124 8.66,8.638 8.658,8.663 8.652,8.738 8.629,8.835 8.59,8.928 8.538,9.013 8.473,9.089 8.397,9.154 8.384,9.162 8.375,9.176 8.31,9.252 8.234,9.317 8.149,9.369 8.057,9.407 7.959,9.431 7.884,9.437 7.86,9.439 6.156,9.439 6.156,38.072 50.652,38.072
GND on L2-GND (split plane): 50.652,9.439 40.952,9.439 40.927,9.437 40.852,9.431 40.755,9.407 40.662,9.369 40.577,9.317 40.501,9.252 40.436,9.176 40.384,9.091 40.345,8.998 40.322,8.901 40.316,8.826 40.314,8.801 40.314,-0.124 8.66,-0.124 8.66,8.638 8.658,8.663 8.652,8.738 8.629,8.835 8.59,8.928 8.538,9.013 8.473,9.089 8.397,9.154 8.384,9.162 8.375,9.176 8.31,9.252 8.234,9.317 8.149,9.369 8.057,9.407 7.959,9.431 7.884,9.437 7.86,9.439 6.156,9.439 6.156,38.072 50.652,38.072

## Keep-outs
Keep-Out Layer:
  lines w0.1: 5.646,38.583 5.646,18.968 5.646,8.929 7.86,8.929 ; 5.722,8.929 7.86,8.929 ; 51.162,38.513 51.162,8.929 ; 7.86,8.929 cw(c7.86,8.801) 7.987,8.801 ; 7.86,8.929 cw(c7.86,8.801) 7.987,8.801 ; 7.86,8.929 cw(c7.86,8.801) 7.987,8.801 ; 7.979,8.758 cw(c8.023,8.638) 8.15,8.638 ; 7.979,8.758 cw(c8.023,8.638) 8.15,8.638 ; 7.979,8.758 cw(c8.023,8.638) 8.15,8.638 ; 8.15,-0.635 8.15,8.638 ; 8.15,-0.635 40.824,-0.635 ; 8.15,-0.635 8.15,8.638 ; 8.15,-0.635 40.824,-0.635 ; 8.15,-0.635 8.15,8.638 ; 8.15,-0.635 40.824,-0.635 ; 40.824,-0.635 40.824,8.801 ; 40.824,-0.635 40.824,8.801 ; 40.824,-0.635 40.824,8.801 ; 40.824,8.801 cw(c40.952,8.801) 40.952,8.929 ; 40.824,8.801 cw(c40.952,8.801) 40.952,8.929 ; 40.824,8.801 cw(c40.952,8.801) 40.952,8.929 ; 40.952,8.929 51.162,8.929 ; 40.952,8.929 51.162,8.929 ; 40.952,8.929 51.162,8.929
  lines w0.127: 5.646,38.583 51.092,38.583 51.162,38.513
  lines w0.254: 7.86,8.801 8.023,8.638 ; 40.952,-0.762 40.952,8.801

## Silkscreen, mask and mechanical layers (free items; w line width, h text height)
Top Overlay:
  text "ON" at 16.891,32.791 h0.5
  text "OFF" at 14.021,32.766 h0.5

## Text inside footprints (layer, text, board x,y; h text height)
J1: Mechanical 15 "CONN OVERHANG" at 14.581,-3.048 h0.5